# EAGLE board ADE7753_Breakout (EAGLE 6.3)
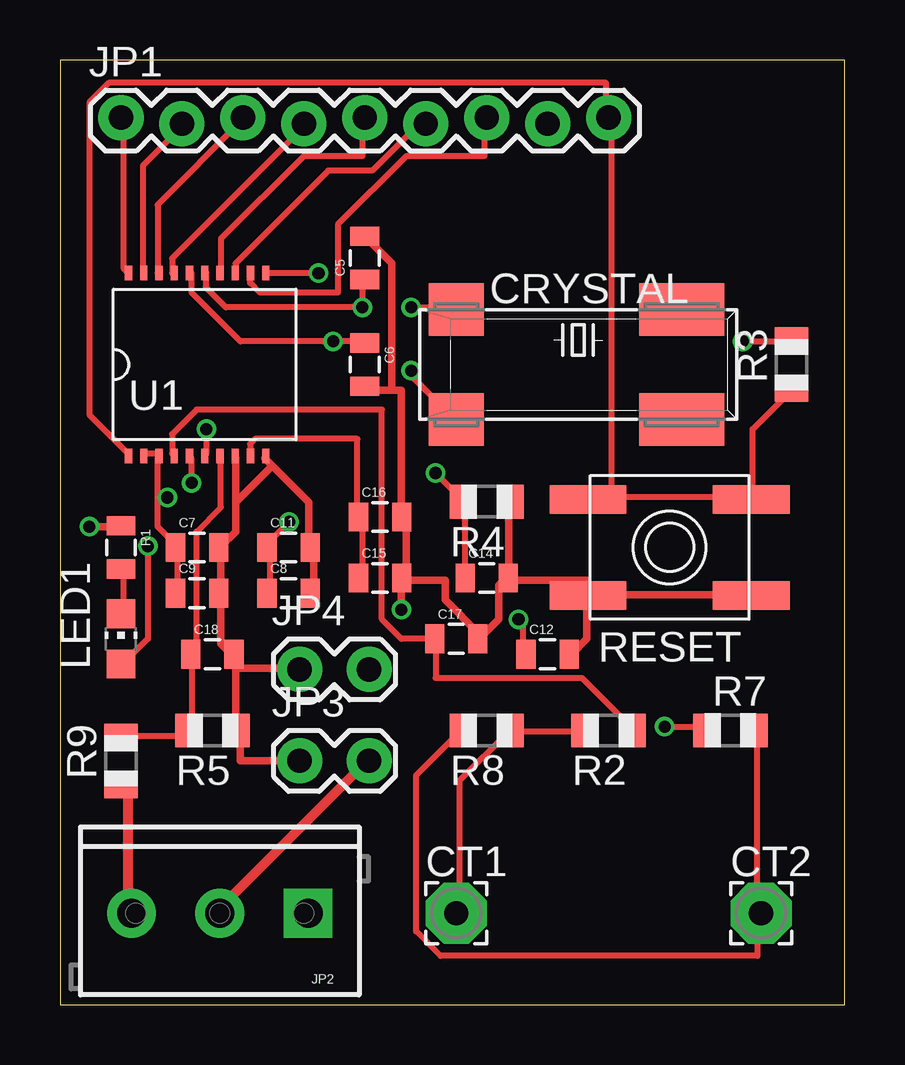
[diagram p0: board, top side]
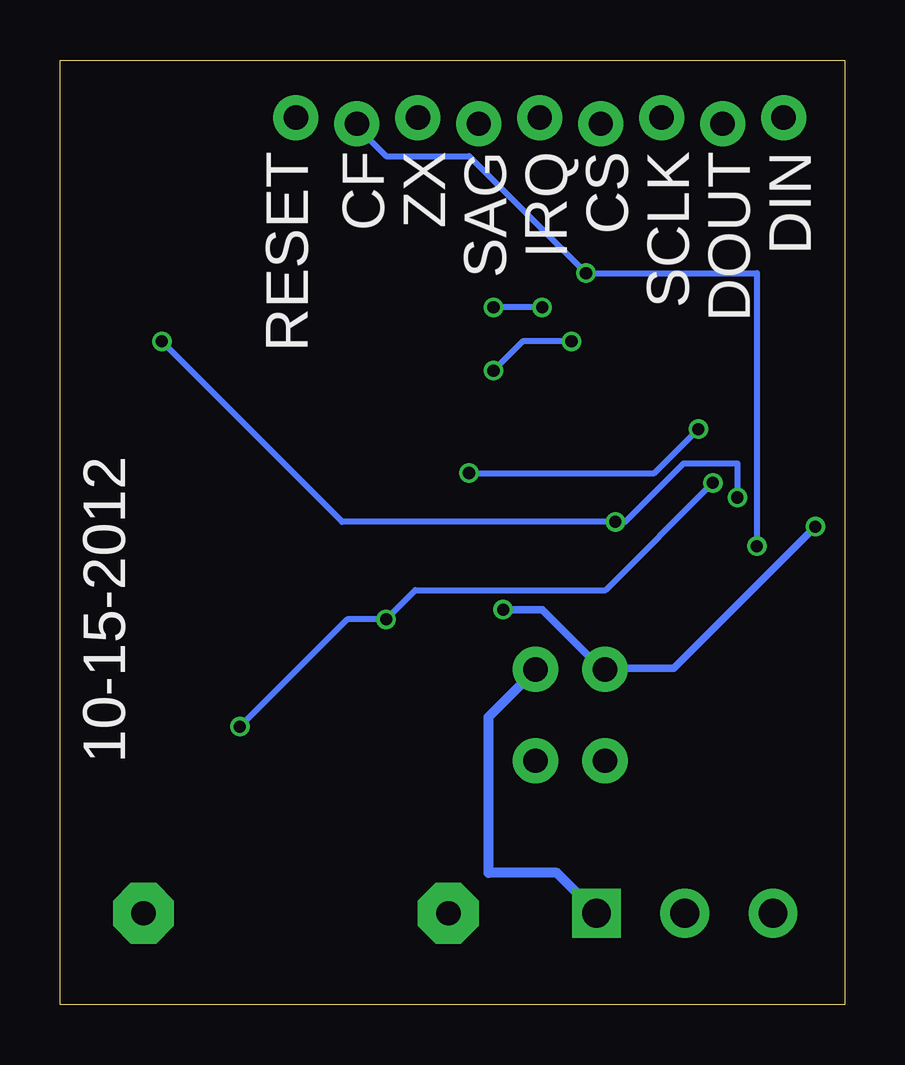
[diagram p1: board, bottom side, seen from below]

Size 32.69 x 39.36 mm. Coordinates in mm from the lower left corner, seen from the top.
Outline: 0,0 32.69,0 32.69,39.36 0,39.36 0,0
Copper layers (1*16): Top 0.035mm / dielectric 1.5mm / Bottom 0.035mm
Design rules "Fusion_eagle_rule_v1.1": minimum track width 6mil, minimum drill 12mil, track to track 6mil, track to pad 6mil, pad to pad 6mil, via to via 6mil, smd to smd 0mil, copper to edge 10mil, drill to drill 10mil, minimum pad ring 10mil, minimum via ring 6mil, stop-mask expansion 2mil, vias tented up to drill 100mil, thermal gap 10mil
Net classes: 0 default: width 0.254 mm, drill 0.508 mm, clearance 0.254 mm; 1 acpower: width 0.406 mm, drill 0.508 mm, clearance 0.762 mm; 2 gnd: width 0.305 mm, drill 0.508 mm, clearance 0.254 mm; 3 5v: width 0.254 mm, drill 0.508 mm, clearance 0.254 mm

## Footprints (pad centres in the part's own frame; a part is rotated, then mirrored left to right if it is on the bottom)
0805 = smd 0.8 x 1.2: 1 -0.9,0; 2 0.9,0
86SMX = smd 2.286 x 2.184: 1 -5.08,-2.286; 4 -5.08,2.286 | smd 3.556 x 2.184: 2 4.318,-2.286; 3 4.318,2.286
2,54/1,0 = drill 1.016 pad 2.54 octagon: 1 0,0
1X09_LOCK = drill 1.016 pad 1.88: 1 0,0.127; 2 2.54,-0.127; 3 5.08,0.127; 4 7.62,-0.127; 5 10.16,0.127; 6 12.7,-0.127; 7 15.24,0.127; 8 17.78,-0.127; 9 20.32,0.127
SCREWTERMINAL-3.5MM-3_LOCK.007S = drill 1.2 pad 2.032 square: 1 -0.178,0 | drill 1.2 pad 2.032: 2 3.5,0; 3 7.178,0
1X02_LOCK = drill 1.016 pad 1.88: 1 -0.178,0; 2 2.718,0
CHIP-LED0805 = smd 1.2 x 1.2: A 0,-1.05; C 0,1.05
R0805 = smd 1.1 x 1.4: 1 -1,0; 2 1,0
EVQ-Q2 = smd 3.2 x 1.2: A -3.4,-2; A' 3.4,-2; B -3.4,2; B' 3.4,2
SSOP20 = smd 0.305 x 0.61: 1 -3.493,-3.81; 2 -2.857,-3.81; 3 -2.223,-3.81; 4 -1.587,-3.81; 5 -0.953,-3.81; 6 -0.318,-3.81; 7 0.318,-3.81; 8 0.953,-3.81; 9 1.587,-3.81; 10 2.223,-3.81; 11 2.223,3.81; 12 1.587,3.81; 13 0.953,3.81; 14 0.318,3.81; 15 -0.318,3.81; 16 -0.953,3.81; 17 -1.587,3.81; 18 -2.223,3.81; 19 -2.857,3.81; 20 -3.493,3.81

## Placement (x,y rotation side)
C5  22pf  [0805]  12.7,31.11 90 top
C6  22pf  [0805]  12.7,26.67 270 top
C7  100nf  [0805]  5.71,19.05 0 top
C8  100nf  [0805]  9.53,17.14 0 top
C9  10uf  [0805]  5.71,17.14 0 top
C11  10uf  [0805]  9.53,19.05 0 top
C12  33nf  [0805]  20.32,14.61 0 top
C14  33nf  [0805]  17.78,17.78 0 top
C15  100nf  [0805]  13.34,17.78 0 top
C16  10uf  [0805]  13.34,20.32 0 top
C17  33nf  [0805]  16.51,15.24 0 top
C18  33nf  [0805]  6.35,14.61 0 top
CRYSTAL  3.579545Mhz  [86SMX]  21.59,26.67 0 top
CT1  [2,54/1,0]  16.51,3.81 0 top
CT2  [2,54/1,0]  29.21,3.81 0 top
JP1  Data  [1X09_LOCK]  2.54,36.83 0 top
JP2  AC Power  [SCREWTERMINAL-3.5MM-3_LOCK.007S]  10.16,3.81 180 top
JP3  Earth  [1X02_LOCK]  10.16,10.16 0 top
JP4  Neutral  [1X02_LOCK]  10.16,13.97 0 top
LED1  [CHIP-LED0805]  2.54,15.24 0 top
R1  1k  [0805]  2.54,19.05 270 top
R2  1k  [R0805]  22.86,11.43 180 top
R3  10k  [R0805]  30.48,26.67 90 top
R4  1k  [R0805]  17.78,20.95 180 top
R5  1k  [R0805]  6.35,11.43 180 top
R7  1k  [R0805]  27.94,11.43 0 top
R8  20  [R0805]  17.78,11.43 180 top
R9  600k  [R0805]  2.54,10.16 90 top
RESET  EVQQ2  [EVQ-Q2]  25.4,19.05 180 top
U1  ADE7753  [SSOP20]  6.35,26.67 0 top

## Library data of the parts
C5-C9 C11 C12 C14-C18 JP3 JP4 = SparkFun-Passives
CRYSTAL = crystal; MF: C-MAC FREQUENCY PRODUCTS LTD; MPN: XTAL003321- 86SMX; OC_FARNELL: 6344914; OC_NEWARK: 01H9866
CT1 CT2 = wirepad
JP1 JP2 = SparkFun-Connectors
LED1 = led
R1 = SparkFun
R2-R5 R7-R9 = adafruit
RESET = adaprog
U1 = ade7735

## Nets
5V [5v]: C7.1 C8.1 C9.1 C11.1 R3.2 U1.2 U1.3
CF: JP1.8 LED1.A U1.11
CLKIN: C5.1 CRYSTAL.4 U1.15
CLKOUT: C6.1 CRYSTAL.1 U1.16
CS: JP1.4 U1.17
DIN: JP1.1 U1.20
DOUT: JP1.2 U1.19
EARTH [acpower]: JP2.2 JP3.2
GND [gnd]: C5.2 C6.2 C7.2 C8.2 C9.2 C11.2 C12.2 C14.2 C15.2 C16.2 C17.2 C18.2 JP3.1 JP4.1 R1.1 R4.1 R5.1 RESET.B RESET.B' U1.8 U1.10
IRQ: JP1.5 U1.14
LIVE [acpower]: JP2.3 R9.1
N$1: CT1.1 R2.2 R8.1
N$2: CT2.1 R7.2 R8.2
N$27: LED1.C R1.2
NEUTRAL [acpower]: JP2.1 JP4.2
REFINOUT: C15.1 C16.1 U1.9
RESET: JP1.9 R3.1 RESET.A RESET.A' U1.1
SAG: JP1.6 U1.13
SCLK: JP1.3 U1.18
V1N: C12.1 R7.1 U1.5
V1P: C17.1 R2.1 U1.4
V2IN: C14.1 R4.2 U1.6
V2P: C18.1 R5.2 R9.2 U1.7
ZX: JP1.7 U1.12

## Tracks (layer width: path | path; a pad name or v marks a point on that pad's centre or on a via)
5V  (via drill 0.51)
  Top 0.254: U1.2 3.45,22.96 4.06,22.96 U1.3 4.06,22.76 4.06,21.13 | 4.06,21.13 4.06,19.91 4.67,19.3 4.67,19.1 C7.1 4.88,18.9 4.88,17.27 C9.1 | C8.1 8.74,17.27 8.74,18.9 C11.1 8.74,19.1 8.74,19.3 v9.55,20.12 | v28.45,27.64 30.48,27.64 R3.2 | v4.47,21.13 4.06,21.13
  Bottom 0.254: v28.45,27.64 20.93,20.12 v9.55,20.12 9.14,20.12 6.71,22.55 4.47,22.55 v4.47,21.13
CF  (via drill 0.51)
  Top 0.254: v10.77,30.48 U1.11 8.53,30.48 | v3.66,19.1 3.66,15.24 2.64,14.22 LED1.A
  Bottom 0.254: JP1.8 20.32,36.58 19.1,35.36 15.65,35.36 v10.77,30.48 3.66,30.48 v3.66,19.1
CLKIN  (via drill 0.51)
  Top 0.254: U1.15 6.1,30.48 6.1,29.87 6.91,29.06 v12.6,29.06 12.6,30.07 C5.1 | v14.63,29.06 16.46,29.06 CRYSTAL.4
  Bottom 0.254: v12.6,29.06 v14.63,29.06
CLKOUT  (via drill 0.51)
  Top 0.254: U1.16 5.49,30.48 5.49,29.67 7.52,27.64 v11.38,27.64 12.6,27.64 C6.1 | v14.63,26.42 14.63,26.21 16.46,24.38 CRYSTAL.1
  Bottom 0.254: v14.63,26.42 13.41,27.64 v11.38,27.64
CS
  Top 0.254: U1.17 4.67,30.48 4.67,31.09 10.16,36.58 JP1.4
DIN
  Top 0.254: U1.20 2.85,30.48 2.64,30.68 2.64,36.78 JP1.1
DOUT
  Top 0.254: U1.19 3.45,30.48 3.45,34.95 5.08,36.58 JP1.2
EARTH
  Top 0.406: JP3.2 12.8,10.16 6.71,4.06 6.71,3.86 JP2.2
GND  (via drill 0.51)
  Top 0.305: v1.22,19.91 2.44,19.91 R1.1 | 8.84,22.45 10.36,20.93 10.36,19.1 C11.2 10.57,18.9 10.57,17.27 C8.2 | 8.84,22.45 8.53,22.76 U1.10 | 7.32,20.93 7.32,19.71 6.71,19.1 C7.2 6.71,18.9 6.71,17.27 C9.2 6.71,17.07 6.71,15.04 7.11,14.63 C18.2 | 7.32,20.93 7.32,22.76 U1.8 | 7.32,14.02 7.32,14.43 C18.2 | 7.32,14.02 7.32,11.58 R5.1 7.52,11.38 7.52,10.16 JP3.1 | 7.32,20.93 8.84,22.45 | 7.32,14.02 9.96,14.02 JP4.1 | 7.32,14.02 C18.2 | C15.2 14.43,17.88 14.43,20.32 C16.2 14.22,20.32 14.22,25.6 13.82,25.6 | 13.82,25.6 12.8,25.6 C6.2 | 13.82,25.6 13.82,30.89 12.8,31.9 C5.2 | C14.2 18.49,17.68 18.29,17.48 18.29,16.05 17.48,15.24 C17.2 17.48,15.44 16.05,16.87 16.05,17.68 14.43,17.68 C15.2 | R4.1 18.69,20.93 18.69,17.88 C14.2 | C12.2 21.34,14.63 21.95,15.24 21.95,16.87 RESET.B' | RESET.B 28.65,17.07 22.15,17.07 RESET.B' | C14.2 18.69,17.68 21.95,17.68 21.95,17.07 RESET.B' | v14.22,16.46 14.22,17.68 C15.2
  Bottom 0.305: v1.22,19.91 7.11,14.02 9.96,14.02 JP4.1 10.16,14.02 12.6,16.46 v14.22,16.46
IRQ
  Top 0.254: U1.14 6.71,30.48 6.71,31.9 10.16,35.36 12.6,35.36 12.6,36.78 JP1.5
LIVE
  Top 0.406: R9.1 2.64,9.14 2.85,8.94 2.85,3.86 JP2.3
N$1
  Top 0.254: R2.2 21.74,11.38 18.9,11.38 R8.1 18.69,11.38 16.66,9.35 16.66,3.86 CT1.1
N$2
  Top 0.254: R8.2 16.66,11.38 14.83,9.55 14.83,3.05 15.85,2.03 29.06,2.03 29.06,3.66 CT2.1 29.06,3.86 29.06,11.38 R7.2
N$27
  Top 0.254: LED1.C 2.64,16.46 2.64,18.09 R1.2
NEUTRAL
  Bottom 0.406: JP4.2 13.01,13.82 14.83,11.99 14.83,5.49 11.99,5.49 10.36,3.86 JP2.1
REFINOUT
  Top 0.254: U1.9 7.92,22.96 7.92,23.37 8.13,23.57 12.39,23.57 12.39,20.32 C16.1 12.6,20.32 12.6,17.88 C15.1
RESET
  Top 0.254: R3.1 30.48,25.6 28.85,23.98 28.85,21.13 RESET.A 28.65,21.13 22.96,21.13 | 22.96,21.13 22.15,21.13 RESET.A' 22.96,21.13 | U1.1 2.85,22.96 1.22,24.59 1.22,37.59 2.03,38.41 22.76,38.41 22.76,36.98 JP1.9 22.96,36.78 22.96,21.13
SAG
  Top 0.254: U1.13 7.32,30.48 7.32,30.89 11.18,34.75 13.01,34.75 14.83,36.58 15.24,36.58 JP1.6
SCLK
  Top 0.254: U1.18 4.06,30.48 4.06,33.33 7.52,36.78 JP1.3
V1N  (via drill 0.51)
  Top 0.254: v5.49,21.74 5.49,22.76 U1.5 | v19.1,16.05 19.3,15.85 19.3,14.63 C12.1 | v25.2,11.58 26.82,11.58 R7.1
  Bottom 0.254: v5.49,21.74 9.96,17.27 17.88,17.27 v19.1,16.05 20.73,16.05 v25.2,11.58
V1P
  Top 0.254: U1.4 4.67,22.96 4.67,23.77 5.69,24.79 13.41,24.79 13.41,16.05 14.22,15.24 C17.1 15.65,15.24 15.65,13.61 21.74,13.61 23.77,11.58 R2.1
V2IN  (via drill 0.51)
  Top 0.254: v6.1,23.98 6.1,22.96 U1.6 | v15.65,22.15 16.66,21.13 R4.2 16.87,20.93 16.87,17.88 C14.1
  Bottom 0.254: v6.1,23.98 7.92,22.15 v15.65,22.15
V2P
  Top 0.254: R9.2 2.64,11.18 5.28,11.18 5.28,11.38 R5.2 5.49,11.58 5.49,14.43 C18.1 5.49,14.63 5.69,14.83 5.69,19.71 6.71,20.73 6.71,22.76 U1.7
ZX
  Top 0.254: U1.12 7.92,30.48 7.92,30.07 8.33,29.67 11.58,29.67 11.58,32.51 14.43,35.36 17.68,35.36 17.68,36.78 JP1.7

## Text on the board
bPlace: DIN | DOUT | SCLK | CS | IRQ | SAG | ZX | CF | RESET | 10-15-2012